# Altium PCB peripheral.PcbDoc
Units mm, origin at the board's own origin, x right, y up, seen from the top; angles counter-clockwise.
Board outline 100.36 x 100.41 mm, 2 copper layers (Top Layer, Bottom Layer); 16 components, 4 nets, 1248 pads, 0 vias.
Unrouted connection lines stored in the file: 60.
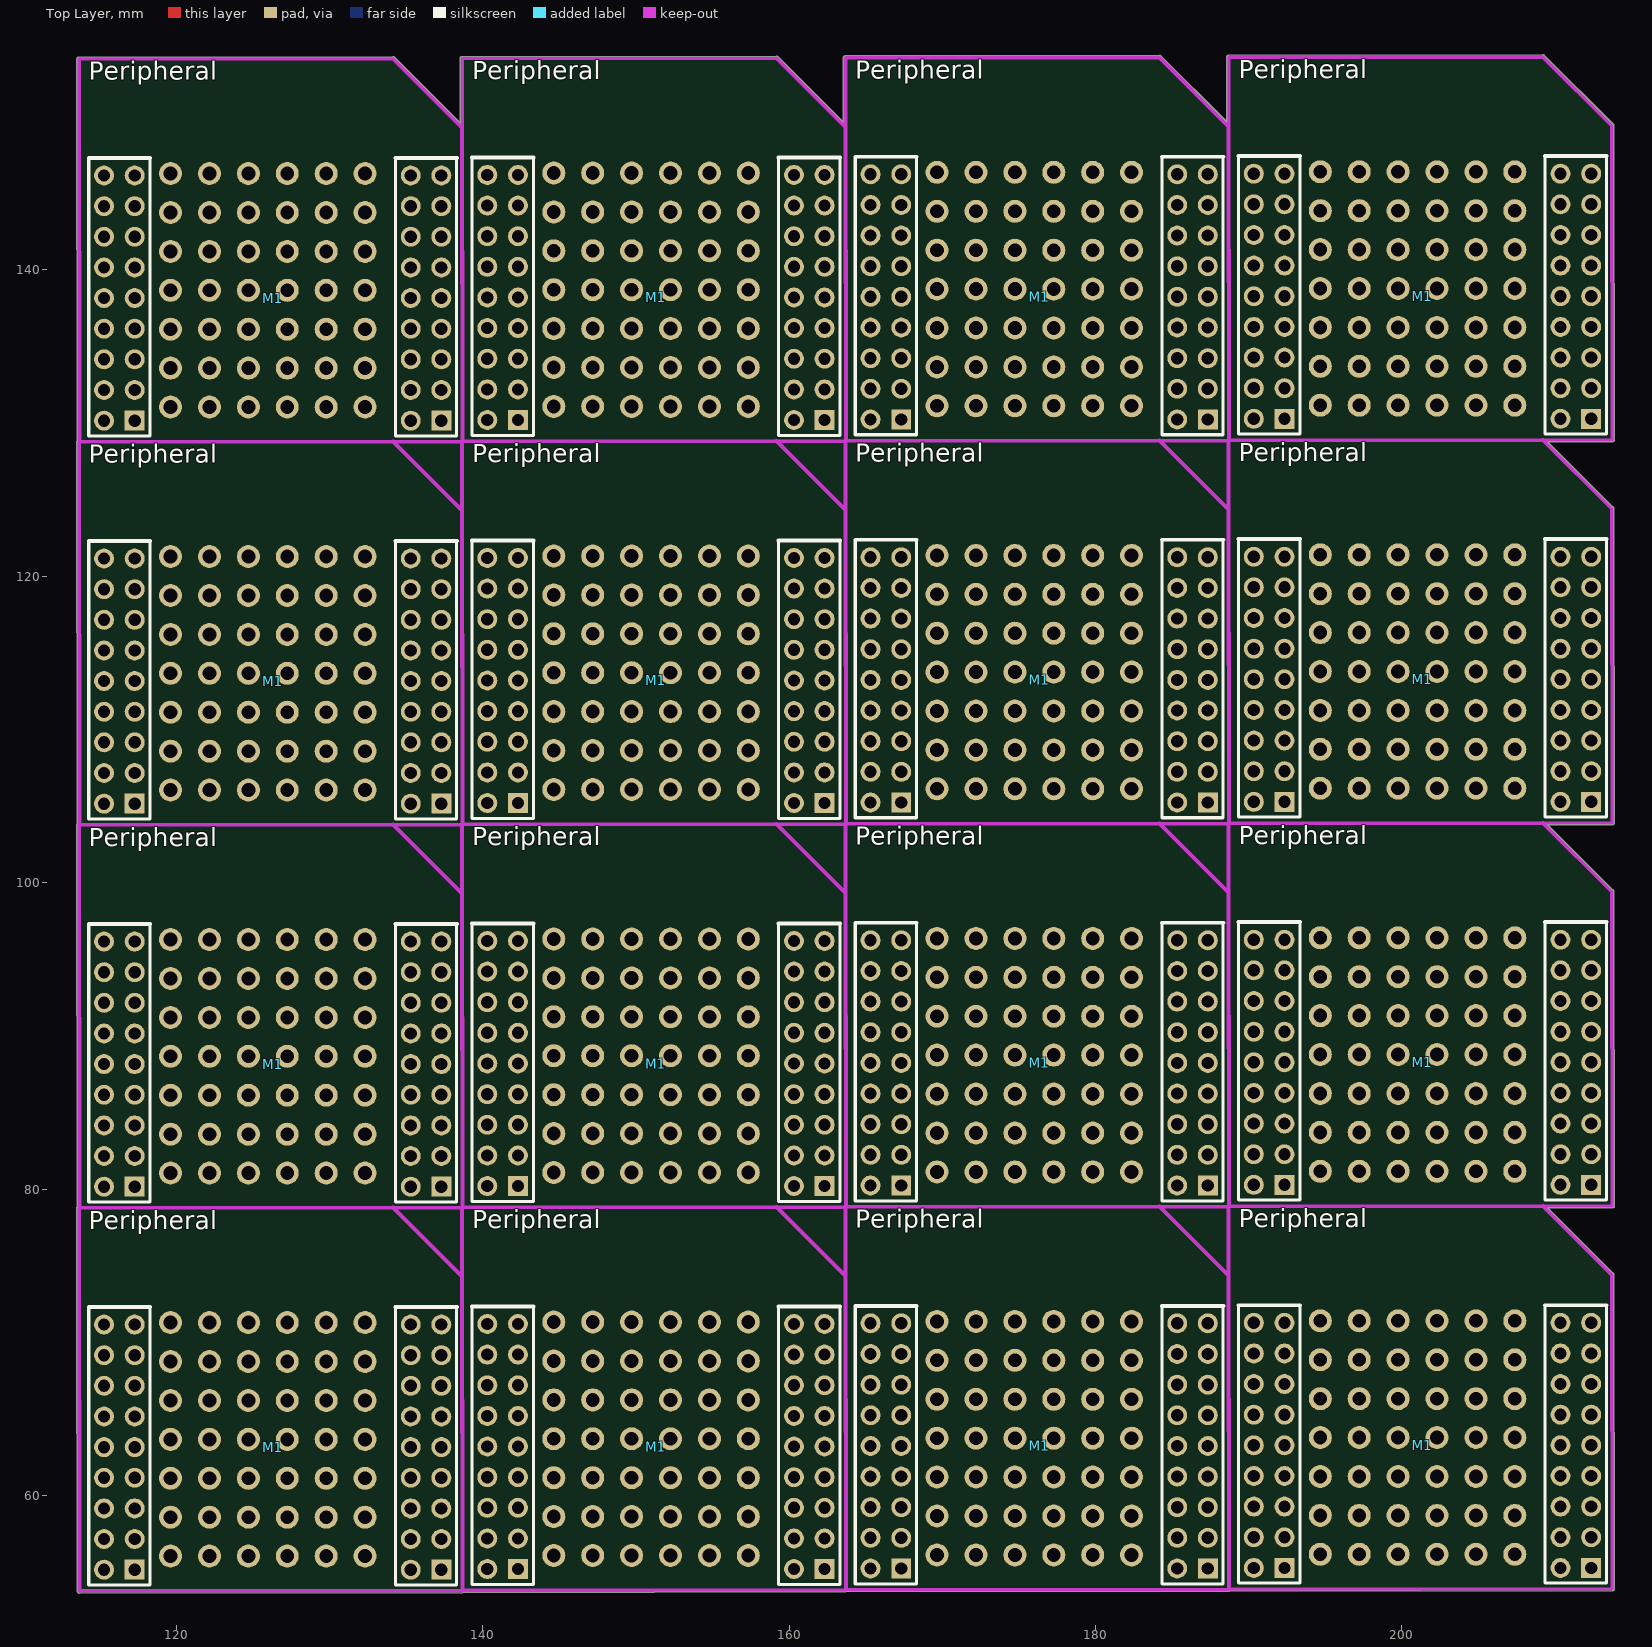
[diagram p0: Top Layer view]
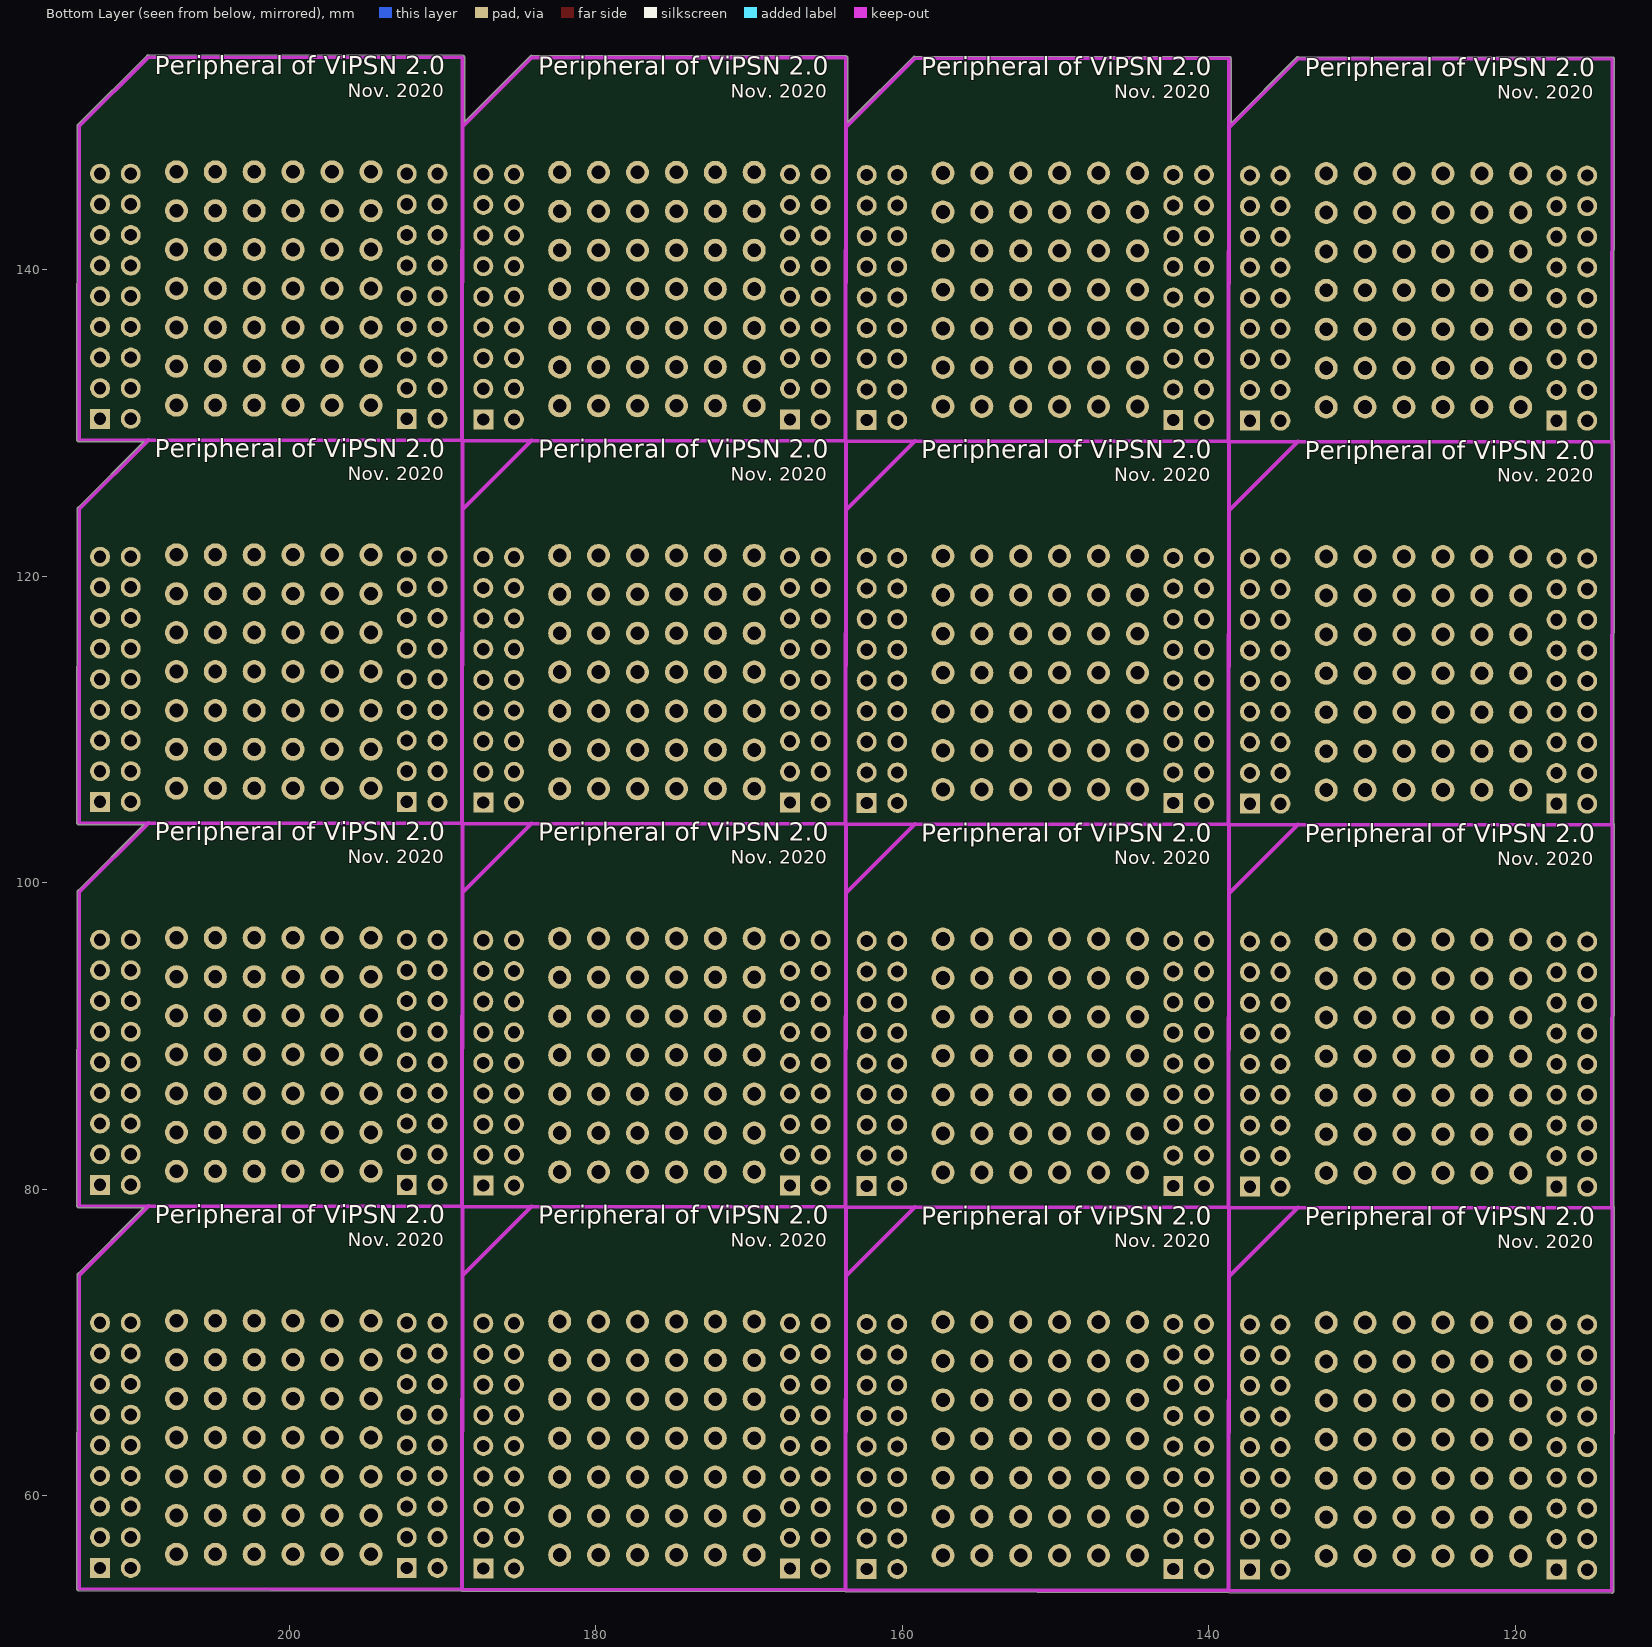
[diagram p1: Bottom Layer view, seen from below]

## Layer stack, top to bottom
Top Layer: signal copper 0.0356
Dielectric: dielectric 0.32, FR-4, Dk 4.8
Bottom Layer: signal copper 0.0356

## Board outline
113.517,78.754 cw(c113.645,78.754) 113.557,78.846 113.517,103.754 cw(c113.645,103.754) 113.557,103.846 113.517,128.754 cw(c113.645,128.754) 113.557,128.846 113.517,153.754 cw(c113.645,153.754) 113.645,153.881 134.16,153.914 cw(c134.16,153.786) 134.251,153.876 134.25,153.876 138.539,149.587 138.533,153.793 cw(c138.66,153.793) 138.66,153.921 159.175,153.953 cw(c159.176,153.826) 159.266,153.915 159.266,153.916 163.555,149.627 163.548,153.833 cw(c163.676,153.833) 163.675,153.96 184.191,153.992 cw(c184.191,153.865) 184.282,153.955 184.281,153.955 188.57,149.666 188.564,153.872 cw(c188.691,153.872) 188.691,154 209.206,154.032 cw(c209.206,153.904) 209.297,153.994 209.296,153.994 213.761,149.529 cw(c213.713,149.411) 213.841,149.412 213.873,128.912 cw(c213.746,128.912) 213.746,128.784 209.513,128.777 213.761,124.529 cw(c213.713,124.411) 213.841,124.412 213.873,103.912 cw(c213.746,103.912) 213.746,103.784 209.513,103.777 213.761,99.529 cw(c213.713,99.411) 213.841,99.412 213.873,78.912 cw(c213.746,78.912) 213.746,78.784 209.513,78.777 213.761,74.529 cw(c213.713,74.411) 213.841,74.412 213.873,53.912 213.873,53.911 cw(c213.746,53.911) 213.746,53.784 188.731,53.745 163.715,53.705 138.7,53.666 113.684,53.627 cw(c113.684,53.754) 113.557,53.754 113.525,74.256

## Design rules (kind name [scope] priority, off if disabled: settings)
Clearance [All] p1: gap=0.127
PolygonConnect [All] p1: connectstyle=Relief reliefconductorwidth=0.254 reliefentries=4 polygonreliefangle="90 Angle"
RoutingVias [All] p1: holewidth=0.711 width=1.27 viastyle="Through Hole" minholewidth=0.711 minwidth=1.27 maxholewidth=0.711 maxwidth=1.27
SilkscreenOverComponentPads SilkToSolderMaskClearance [IsPad] p1: minsilkscreentomaskgap=0.254
SolderMaskExpansion [All] p1: expansion=0.102
Width [All] p1: maxlimit=0.254 minlimit=0.254 preferedwidth=0.254
27 further rules are at their usual default settings.

## Components (designator, comment, footprint, x,y, rotation, side; value= is the part's Value field where it differs from the comment)
M1 "MHDR2X18" module9x4 212.33,146.277 r180 top
M1 "MHDR2X18" module9x4 212.33,121.277 r180 top
M1 "MHDR2X18" module9x4 212.33,96.277 r180 top
M1 "MHDR2X18" module9x4 212.33,71.277 r180 top
M1 "MHDR2X18" module9x4 187.314,146.238 r180 top
M1 "MHDR2X18" module9x4 187.314,121.238 r180 top
M1 "MHDR2X18" module9x4 187.314,96.238 r180 top
M1 "MHDR2X18" module9x4 187.314,71.238 r180 top
M1 "MHDR2X18" module9x4 162.299,146.199 r180 top
M1 "MHDR2X18" module9x4 162.299,121.199 r180 top
M1 "MHDR2X18" module9x4 162.299,96.199 r180 top
M1 "MHDR2X18" module9x4 162.299,71.199 r180 top
M1 "MHDR2X18" module9x4 137.283,146.159 r180 top
M1 "MHDR2X18" module9x4 137.283,121.159 r180 top
M1 "MHDR2X18" module9x4 137.283,96.159 r180 top
M1 "MHDR2X18" module9x4 137.283,71.159 r180 top

## Footprints (in the part's own frame and the unit in brackets; to place one, negate y for a bottom-side part, rotate by r counter-clockwise, add the part's x,y. Pads: shape width x height; smd on the part's side, far side on the other; paste and mask are expansions set on the pad)
module9x4 [mm]
  rect 1.3x1.3 hole 0.8: 1(-0.025,16.002) 36(19.99,16.002)
  round 1.3 hole 0.8: 2(21.99,16.002) 3(-0.025,14.002) 4(21.99,14.002) 5(-0.025,12.002) 6(21.99,12.002) 7(-0.025,10.002) 8(21.99,10.002) 9(-0.025,8.002) 10(21.99,8.002) 11(-0.025,6.002) 12(21.99,6.002) 13(-0.025,4.002) 14(21.99,4.002) 15(-0.025,2.002) 16(21.99,2.002) 17(-0.025,0.002) 18(21.99,0.002) 19(1.975,0.002) 20(19.99,0.002) 21(1.975,2.002) 22(19.99,2.002) 23(1.975,4.002) 24(19.99,4.002) 25(1.975,6.002) 26(19.99,6.002) 27(1.975,8.002) 28(19.99,8.002) 29(1.975,10.002) 30(19.99,10.002) 31(1.975,12.002) 32(19.99,12.002) 33(1.975,14.002) 34(19.99,14.002) 35(1.975,16.002)
  silkscreen extent -1.04,-1.14 22.99,17

## Part data
M1 M1 M1 M1 M1 M1 M1 M1 M1 M1 M1 M1 M1 M1 M1 M1: "Header, 18-Pin, Dual row"

## Free pads (board coordinates)
  round 1.5 hole 0.9: 1(119.63,56.044) 1(119.63,58.584) 1(119.63,61.124) 1(119.63,63.664) 1(119.63,66.202) 1(119.63,68.742) 1(119.63,71.284) 1(119.63,81.044) 1(119.63,83.584) 1(119.63,86.124) 1(119.63,88.664) 1(119.63,91.202) 1(119.63,93.742) 1(119.63,96.284) 1(119.63,106.044) 1(119.63,108.584) 1(119.63,111.124) 1(119.63,113.664) 1(119.63,116.202) 1(119.63,118.742) 1(119.63,121.284) 1(119.63,131.044) 1(119.63,133.584) 1(119.63,136.124) 1(119.63,138.664) 1(119.63,141.202) 1(119.63,143.742) 1(119.63,146.284) 1(122.172,56.044) 1(122.172,58.584) 1(122.172,61.124) 1(122.172,63.664) 1(122.172,66.202) 1(122.172,68.742) 1(122.172,71.284) 1(122.172,81.044) 1(122.172,83.584) 1(122.172,86.124) 1(122.172,88.664) 1(122.172,91.202) 1(122.172,93.742) 1(122.172,96.284) 1(122.172,106.044) 1(122.172,108.584) 1(122.172,111.124) 1(122.172,113.664) 1(122.172,116.202) 1(122.172,118.742) 1(122.172,121.284) 1(122.172,131.044) 1(122.172,133.584) 1(122.172,136.124) 1(122.172,138.664) 1(122.172,141.202) 1(122.172,143.742) 1(122.172,146.284) 1(124.712,56.044) 1(124.712,58.584) 1(124.712,61.124) 1(124.712,63.664) 1(124.712,66.202) 1(124.712,68.742) 1(124.712,71.284) 1(124.712,81.044) 1(124.712,83.584) 1(124.712,86.124) 1(124.712,88.664) 1(124.712,91.202) 1(124.712,93.742) 1(124.712,96.284) 1(124.712,106.044) 1(124.712,108.584) 1(124.712,111.124) 1(124.712,113.664) 1(124.712,116.202) 1(124.712,118.742) 1(124.712,121.284) 1(124.712,131.044) 1(124.712,133.584) 1(124.712,136.124) 1(124.712,138.664) 1(124.712,141.202) 1(124.712,143.742) 1(124.712,146.284) 1(127.25,56.044) 1(127.25,58.584) 1(127.25,61.124) 1(127.25,63.664) 1(127.25,66.202) 1(127.25,68.742) 1(127.25,71.284) 1(127.25,81.044) 1(127.25,83.584) 1(127.25,86.124) 1(127.25,88.664) 1(127.25,91.202) 1(127.25,93.742) 1(127.25,96.284) 1(127.25,106.044) 1(127.25,108.584) 1(127.25,111.124) 1(127.25,113.664) 1(127.25,116.202) 1(127.25,118.742) 1(127.25,121.284) 1(127.25,131.044) 1(127.25,133.584) 1(127.25,136.124) 1(127.25,138.664) 1(127.25,141.202) 1(127.25,143.742) 1(127.25,146.284) 1(129.79,56.044) 1(129.79,58.584) 1(129.79,61.124) 1(129.79,63.664) 1(129.79,66.202) 1(129.79,68.742) 1(129.79,71.284) 1(129.79,81.044) 1(129.79,83.584) 1(129.79,86.124) 1(129.79,88.664) 1(129.79,91.202) 1(129.79,93.742) 1(129.79,96.284) 1(129.79,106.044) 1(129.79,108.584) 1(129.79,111.124) 1(129.79,113.664) 1(129.79,116.202) 1(129.79,118.742) 1(129.79,121.284) 1(129.79,131.044) 1(129.79,133.584) 1(129.79,136.124) 1(129.79,138.664) 1(129.79,141.202) 1(129.79,143.742) 1(129.79,146.284) 1(132.33,56.044) 1(132.33,58.584) 1(132.33,61.124) 1(132.33,63.664) 1(132.33,66.202) 1(132.33,68.742) 1(132.33,71.284) 1(132.33,81.044) 1(132.33,83.584) 1(132.33,86.124) 1(132.33,88.664) 1(132.33,91.202) 1(132.33,93.742) 1(132.33,96.284) 1(132.33,106.044) 1(132.33,108.584) 1(132.33,111.124) 1(132.33,113.664) 1(132.33,116.202) 1(132.33,118.742) 1(132.33,121.284) 1(132.33,131.044) 1(132.33,133.584) 1(132.33,136.124) 1(132.33,138.664) 1(132.33,141.202) 1(132.33,143.742) 1(132.33,146.284) 1(144.646,56.084) 1(144.646,58.624) 1(144.646,61.164) 1(144.646,63.704) 1(144.646,66.242) 1(144.646,68.782) 1(144.646,71.324) 1(144.646,81.084) 1(144.646,83.624) 1(144.646,86.164) 1(144.646,88.704) 1(144.646,91.242) 1(144.646,93.782) 1(144.646,96.324) 1(144.646,106.084) 1(144.646,108.624) 1(144.646,111.164) 1(144.646,113.704) 1(144.646,116.242) 1(144.646,118.782) 1(144.646,121.324) 1(144.646,131.084) 1(144.646,133.624) 1(144.646,136.164) 1(144.646,138.704) 1(144.646,141.242) 1(144.646,143.782) 1(144.646,146.324) 1(147.188,56.084) 1(147.188,58.624) 1(147.188,61.164) 1(147.188,63.704) 1(147.188,66.242) 1(147.188,68.782) 1(147.188,71.324) 1(147.188,81.084) 1(147.188,83.624) 1(147.188,86.164) 1(147.188,88.704) 1(147.188,91.242) 1(147.188,93.782) 1(147.188,96.324) 1(147.188,106.084) 1(147.188,108.624) 1(147.188,111.164) 1(147.188,113.704) 1(147.188,116.242) 1(147.188,118.782) 1(147.188,121.324) 1(147.188,131.084) 1(147.188,133.624) 1(147.188,136.164) 1(147.188,138.704) 1(147.188,141.242) 1(147.188,143.782) 1(147.188,146.324) 1(149.728,56.084) 1(149.728,58.624) 1(149.728,61.164) 1(149.728,63.704) 1(149.728,66.242) 1(149.728,68.782) 1(149.728,71.324) 1(149.728,81.084) 1(149.728,83.624) 1(149.728,86.164) 1(149.728,88.704) 1(149.728,91.242) 1(149.728,93.782) 1(149.728,96.324) 1(149.728,106.084) 1(149.728,108.624) 1(149.728,111.164) 1(149.728,113.704) 1(149.728,116.242) 1(149.728,118.782) 1(149.728,121.324) 1(149.728,131.084) 1(149.728,133.624) 1(149.728,136.164) 1(149.728,138.704) 1(149.728,141.242) 1(149.728,143.782) 1(149.728,146.324) 1(152.266,56.084) 1(152.266,58.624) 1(152.266,61.164) 1(152.266,63.704) 1(152.266,66.242) 1(152.266,68.782) 1(152.266,71.324) 1(152.266,81.084) 1(152.266,83.624) 1(152.266,86.164) 1(152.266,88.704) 1(152.266,91.242) 1(152.266,93.782) 1(152.266,96.324) 1(152.266,106.084) 1(152.266,108.624) 1(152.266,111.164) 1(152.266,113.704) 1(152.266,116.242) 1(152.266,118.782) 1(152.266,121.324) 1(152.266,131.084) 1(152.266,133.624) 1(152.266,136.164) 1(152.266,138.704) 1(152.266,141.242) 1(152.266,143.782) 1(152.266,146.324) 1(154.806,56.084) 1(154.806,58.624) 1(154.806,61.164) 1(154.806,63.704) 1(154.806,66.242) 1(154.806,68.782) 1(154.806,71.324) 1(154.806,81.084) 1(154.806,83.624) 1(154.806,86.164) 1(154.806,88.704) 1(154.806,91.242) 1(154.806,93.782) 1(154.806,96.324) 1(154.806,106.084) 1(154.806,108.624) 1(154.806,111.164) 1(154.806,113.704) 1(154.806,116.242) 1(154.806,118.782) 1(154.806,121.324) 1(154.806,131.084) 1(154.806,133.624) 1(154.806,136.164) 1(154.806,138.704) 1(154.806,141.242) 1(154.806,143.782) 1(154.806,146.324) 1(157.346,56.084) 1(157.346,58.624) 1(157.346,61.164) 1(157.346,63.704) 1(157.346,66.242) 1(157.346,68.782) 1(157.346,71.324) 1(157.346,81.084) 1(157.346,83.624) 1(157.346,86.164) 1(157.346,88.704) 1(157.346,91.242) 1(157.346,93.782) 1(157.346,96.324) 1(157.346,106.084) 1(157.346,108.624) 1(157.346,111.164) 1(157.346,113.704) 1(157.346,116.242) 1(157.346,118.782) 1(157.346,121.324) 1(157.346,131.084) 1(157.346,133.624) 1(157.346,136.164) 1(157.346,138.704) 1(157.346,141.242) 1(157.346,143.782) 1(157.346,146.324) 1(169.661,56.123) 1(169.661,58.663) 1(169.661,61.203) 1(169.661,63.743) 1(169.661,66.281) 1(169.661,68.821) 1(169.661,71.363) 1(169.661,81.123) 1(169.661,83.663) 1(169.661,86.203) 1(169.661,88.743) 1(169.661,91.281) 1(169.661,93.821) 1(169.661,96.363) 1(169.661,106.123) 1(169.661,108.663) 1(169.661,111.203) 1(169.661,113.743) 1(169.661,116.281) 1(169.661,118.821) 1(169.661,121.363) 1(169.661,131.123) 1(169.661,133.663) 1(169.661,136.203) 1(169.661,138.743) 1(169.661,141.281) 1(169.661,143.821) 1(169.661,146.363) 1(172.203,56.123) 1(172.203,58.663) 1(172.203,61.203) 1(172.203,63.743) 1(172.203,66.281) 1(172.203,68.821) 1(172.203,71.363) 1(172.203,81.123) 1(172.203,83.663) 1(172.203,86.203) 1(172.203,88.743) 1(172.203,91.281) 1(172.203,93.821) 1(172.203,96.363) 1(172.203,106.123) 1(172.203,108.663) 1(172.203,111.203) 1(172.203,113.743) 1(172.203,116.281) 1(172.203,118.821) 1(172.203,121.363) 1(172.203,131.123) 1(172.203,133.663) 1(172.203,136.203) 1(172.203,138.743) 1(172.203,141.281) 1(172.203,143.821) 1(172.203,146.363) 1(174.743,56.123) 1(174.743,58.663) 1(174.743,61.203) 1(174.743,63.743) 1(174.743,66.281) 1(174.743,68.821) 1(174.743,71.363) 1(174.743,81.123) 1(174.743,83.663) 1(174.743,86.203) 1(174.743,88.743) 1(174.743,91.281) 1(174.743,93.821) 1(174.743,96.363) 1(174.743,106.123) 1(174.743,108.663) 1(174.743,111.203) 1(174.743,113.743) 1(174.743,116.281) 1(174.743,118.821) 1(174.743,121.363) 1(174.743,131.123) 1(174.743,133.663) 1(174.743,136.203) 1(174.743,138.743) 1(174.743,141.281) 1(174.743,143.821) 1(174.743,146.363) 1(177.281,56.123) 1(177.281,58.663) 1(177.281,61.203) 1(177.281,63.743) 1(177.281,66.281) 1(177.281,68.821) 1(177.281,71.363) 1(177.281,81.123) 1(177.281,83.663) 1(177.281,86.203) 1(177.281,88.743) 1(177.281,91.281) 1(177.281,93.821) 1(177.281,96.363) 1(177.281,106.123) 1(177.281,108.663) 1(177.281,111.203) 1(177.281,113.743) 1(177.281,116.281) 1(177.281,118.821) 1(177.281,121.363) 1(177.281,131.123) 1(177.281,133.663) 1(177.281,136.203) 1(177.281,138.743) 1(177.281,141.281) 1(177.281,143.821) 1(177.281,146.363) 1(179.821,56.123) 1(179.821,58.663) 1(179.821,61.203) 1(179.821,63.743) 1(179.821,66.281) 1(179.821,68.821) 1(179.821,71.363) 1(179.821,81.123) 1(179.821,83.663) 1(179.821,86.203) 1(179.821,88.743) 1(179.821,91.281) 1(179.821,93.821) 1(179.821,96.363) 1(179.821,106.123) 1(179.821,108.663) 1(179.821,111.203) 1(179.821,113.743) 1(179.821,116.281) 1(179.821,118.821) 1(179.821,121.363) 1(179.821,131.123) 1(179.821,133.663) 1(179.821,136.203) 1(179.821,138.743) 1(179.821,141.281) 1(179.821,143.821) 1(179.821,146.363) 1(182.361,56.123) 1(182.361,58.663) 1(182.361,61.203) 1(182.361,63.743) 1(182.361,66.281) 1(182.361,68.821) 1(182.361,71.363) 1(182.361,81.123) 1(182.361,83.663) 1(182.361,86.203) 1(182.361,88.743) 1(182.361,91.281) 1(182.361,93.821) 1(182.361,96.363) 1(182.361,106.123) 1(182.361,108.663) 1(182.361,111.203) 1(182.361,113.743) 1(182.361,116.281) 1(182.361,118.821) 1(182.361,121.363) 1(182.361,131.123) 1(182.361,133.663) 1(182.361,136.203) 1(182.361,138.743) 1(182.361,141.281) 1(182.361,143.821) 1(182.361,146.363) 1(194.677,56.162) 1(194.677,58.702) 1(194.677,61.242) 1(194.677,63.782) 1(194.677,66.32) 1(194.677,68.86) 1(194.677,71.402) 1(194.677,81.162) 1(194.677,83.702) 1(194.677,86.242) 1(194.677,88.782) 1(194.677,91.32) 1(194.677,93.86) 1(194.677,96.402) 1(194.677,106.162) 1(194.677,108.702) 1(194.677,111.242) 1(194.677,113.782) 1(194.677,116.32) 1(194.677,118.86) 1(194.677,121.402) 1(194.677,131.162) 1(194.677,133.702) 1(194.677,136.242) 1(194.677,138.782) 1(194.677,141.32) 1(194.677,143.86) 1(194.677,146.402) 1(197.219,56.162) 1(197.219,58.702) 1(197.219,61.242) 1(197.219,63.782) 1(197.219,66.32) 1(197.219,68.86) 1(197.219,71.402) 1(197.219,81.162) 1(197.219,83.702) 1(197.219,86.242) 1(197.219,88.782) 1(197.219,91.32) 1(197.219,93.86) 1(197.219,96.402) 1(197.219,106.162) 1(197.219,108.702) 1(197.219,111.242) 1(197.219,113.782) 1(197.219,116.32) 1(197.219,118.86) 1(197.219,121.402) 1(197.219,131.162) 1(197.219,133.702) 1(197.219,136.242) 1(197.219,138.782) 1(197.219,141.32) 1(197.219,143.86) 1(197.219,146.402) 1(199.759,56.162) 1(199.759,58.702) 1(199.759,61.242) 1(199.759,63.782) 1(199.759,66.32) 1(199.759,68.86) 1(199.759,71.402) 1(199.759,81.162) 1(199.759,83.702) 1(199.759,86.242) 1(199.759,88.782) 1(199.759,91.32) 1(199.759,93.86) 1(199.759,96.402) 1(199.759,106.162) 1(199.759,108.702) 1(199.759,111.242) 1(199.759,113.782) 1(199.759,116.32) 1(199.759,118.86) 1(199.759,121.402) 1(199.759,131.162) 1(199.759,133.702) 1(199.759,136.242) 1(199.759,138.782) 1(199.759,141.32) 1(199.759,143.86) 1(199.759,146.402) 1(202.297,56.162) 1(202.297,58.702) 1(202.297,61.242) 1(202.297,63.782) 1(202.297,66.32) 1(202.297,68.86) 1(202.297,71.402) 1(202.297,81.162) 1(202.297,83.702) 1(202.297,86.242) 1(202.297,88.782) 1(202.297,91.32) 1(202.297,93.86) 1(202.297,96.402) 1(202.297,106.162) 1(202.297,108.702) 1(202.297,111.242) 1(202.297,113.782) 1(202.297,116.32) 1(202.297,118.86) 1(202.297,121.402) 1(202.297,131.162) 1(202.297,133.702) 1(202.297,136.242) 1(202.297,138.782) 1(202.297,141.32) 1(202.297,143.86) 1(202.297,146.402) 1(204.837,56.162) 1(204.837,58.702) 1(204.837,61.242) 1(204.837,63.782) 1(204.837,66.32) 1(204.837,68.86) 1(204.837,71.402) 1(204.837,81.162) 1(204.837,83.702) 1(204.837,86.242) 1(204.837,88.782) 1(204.837,91.32) 1(204.837,93.86) 1(204.837,96.402) 1(204.837,106.162) 1(204.837,108.702) 1(204.837,111.242) 1(204.837,113.782) 1(204.837,116.32) 1(204.837,118.86) 1(204.837,121.402) 1(204.837,131.162) 1(204.837,133.702) 1(204.837,136.242) 1(204.837,138.782) 1(204.837,141.32) 1(204.837,143.86) 1(204.837,146.402) 1(207.377,56.162) 1(207.377,58.702) 1(207.377,61.242) 1(207.377,63.782) 1(207.377,66.32) 1(207.377,68.86) 1(207.377,71.402) 1(207.377,81.162) 1(207.377,83.702) 1(207.377,86.242) 1(207.377,88.782) 1(207.377,91.32) 1(207.377,93.86) 1(207.377,96.402) 1(207.377,106.162) 1(207.377,108.702) 1(207.377,111.242) 1(207.377,113.782) 1(207.377,116.32) 1(207.377,118.86) 1(207.377,121.402) 1(207.377,131.162) 1(207.377,133.702) 1(207.377,136.242) 1(207.377,138.782) 1(207.377,141.32) 1(207.377,143.86) 1(207.377,146.402)

## Nets (pads, with @x,y where several pads share a name; then routed paths per layer and width w, separated by ;. In a path a pad name is that pad's centre, name@x,y a point inside that pad or via, vN(x,y) a via of type N, cw(c..) or ccw(c..) an arc to the next point about the centre after c; other vN are vias at no path point)
GND: M1.36
PZ1: M1.3
PZ2: M1.1
VSTO: M1.2
pads on no net: M1.4 M1.5 M1.6 M1.7 M1.8 M1.9 M1.10 M1.11 M1.12 M1.13 M1.14 M1.15 M1.16 M1.17 M1.18 M1.19 M1.20 M1.21 M1.22 M1.23 M1.24 M1.25 M1.26 M1.27 M1.28 M1.29 M1.30 M1.31 M1.32 M1.33 M1.34 M1.35

## Keep-outs
Keep-Out Layer:
  lines w0.254: 113.652,74.254 113.684,53.754 ; 138.66,74.286 134.16,78.786 113.645,78.754 113.684,53.754 ; 138.66,99.286 134.16,103.786 113.645,103.754 113.684,78.754 138.7,78.793 ; 138.66,124.286 134.16,128.786 113.645,128.754 113.684,103.754 138.7,103.793 ; 138.66,149.286 134.16,153.786 113.645,153.754 113.684,128.754 138.7,128.793 ; 138.667,74.293 138.7,53.793 ; 138.667,99.293 138.7,78.793 ; 138.667,124.293 138.7,103.793 ; 138.667,149.293 138.7,128.793 ; 163.676,74.326 159.176,78.826 138.66,78.793 138.7,53.793 ; 163.676,99.326 159.176,103.826 138.66,103.793 138.7,78.793 ; 163.676,124.326 159.176,128.826 138.66,128.793 138.7,103.793 ; 163.676,149.326 159.176,153.826 138.66,153.793 138.7,128.793 ; 163.683,74.333 163.715,53.833 ; 163.683,99.333 163.715,78.833 ; 163.683,124.333 163.715,103.833 ; 163.683,149.333 163.715,128.833 ; 188.691,74.365 184.191,78.865 163.676,78.833 163.715,53.833 ; 188.691,99.365 184.191,103.865 163.676,103.833 163.715,78.833 ; 188.691,124.365 184.191,128.865 163.676,128.833 163.715,103.833 ; 188.691,149.365 184.191,153.865 163.676,153.833 163.715,128.833 ; 188.698,74.372 188.73,53.872 ; 188.698,99.372 188.73,78.872 ; 188.698,124.372 188.73,103.872 ; 188.698,149.372 188.73,128.872 ; 213.706,74.404 209.206,78.904 188.691,78.872 188.73,53.872 ; 213.706,99.404 209.206,103.904 188.691,103.872 188.73,78.872 ; 213.706,124.404 209.206,128.904 188.691,128.872 188.73,103.872 ; 213.706,149.404 209.206,153.904 188.691,153.872 188.73,128.872 ; 213.713,74.411 213.746,53.911 188.73,53.872 ; 213.713,99.411 213.746,78.912 188.73,78.872 ; 213.713,124.411 213.746,103.912 188.73,103.872 ; 213.713,149.411 213.746,128.912 188.73,128.872 ; 113.684,53.754 138.7,53.793 ; 138.7,53.793 163.715,53.833 ; 138.7,78.793 163.715,78.833 ; 138.7,103.793 163.715,103.833 ; 138.7,128.793 163.715,128.833 ; 163.715,53.833 188.73,53.872 ; 163.715,78.833 188.73,78.872 ; 163.715,103.833 188.73,103.872 ; 163.715,128.833 188.73,128.872

## Silkscreen, mask and mechanical layers (free items; w line width, h text height)
Top Overlay:
  text "Peripheral" at 189.343,152.119 h2.03
  text "Peripheral" at 164.327,152.08 h2.03
  text "Peripheral" at 139.312,152.041 h2.03
  text "Peripheral" at 114.296,152.001 h2.03
  text "Peripheral" at 189.343,127.119 h2.03
  text "Peripheral" at 164.327,127.08 h2.03
  text "Peripheral" at 139.312,127.041 h2.03
  text "Peripheral" at 114.296,127.001 h2.03
  text "Peripheral" at 189.343,102.119 h2.03
  text "Peripheral" at 164.327,102.08 h2.03
  text "Peripheral" at 139.312,102.041 h2.03
  text "Peripheral" at 114.296,102.001 h2.03
  text "Peripheral" at 189.343,77.119 h2.03
  text "Peripheral" at 164.327,77.08 h2.03
  text "Peripheral" at 139.312,77.041 h2.03
  text "Peripheral" at 114.296,77.001 h2.03
Bottom Overlay:
  text "Peripheral of ViPSN 2.0" at 208.774,152.373 h2.03
  text "Peripheral of ViPSN 2.0" at 183.758,152.334 h2.03
  text "Peripheral of ViPSN 2.0" at 158.743,152.295 h2.03
  text "Peripheral of ViPSN 2.0" at 133.727,152.255 h2.03
  text "Nov. 2020" at 196.201,150.976 h1.52
  text "Nov. 2020" at 171.185,150.937 h1.52
  text "Nov. 2020" at 146.17,150.898 h1.52
  text "Nov. 2020" at 121.154,150.858 h1.52
  text "Peripheral of ViPSN 2.0" at 208.774,127.373 h2.03
  text "Peripheral of ViPSN 2.0" at 183.758,127.334 h2.03
  text "Peripheral of ViPSN 2.0" at 158.743,127.295 h2.03
  text "Peripheral of ViPSN 2.0" at 133.727,127.255 h2.03
  text "Nov. 2020" at 196.201,125.976 h1.52
  text "Nov. 2020" at 171.185,125.937 h1.52
  text "Nov. 2020" at 146.17,125.898 h1.52
  text "Nov. 2020" at 121.154,125.858 h1.52
  text "Peripheral of ViPSN 2.0" at 208.774,102.373 h2.03
  text "Peripheral of ViPSN 2.0" at 183.758,102.334 h2.03
  text "Peripheral of ViPSN 2.0" at 158.743,102.295 h2.03
  text "Peripheral of ViPSN 2.0" at 133.727,102.255 h2.03
  text "Nov. 2020" at 196.201,100.976 h1.52
  text "Nov. 2020" at 171.185,100.937 h1.52
  text "Nov. 2020" at 146.17,100.898 h1.52
  text "Nov. 2020" at 121.154,100.858 h1.52
  text "Peripheral of ViPSN 2.0" at 208.774,77.373 h2.03
  text "Peripheral of ViPSN 2.0" at 183.758,77.334 h2.03
  text "Peripheral of ViPSN 2.0" at 158.743,77.295 h2.03
  text "Peripheral of ViPSN 2.0" at 133.727,77.255 h2.03
  text "Nov. 2020" at 196.201,75.976 h1.52
  text "Nov. 2020" at 171.185,75.937 h1.52
  text "Nov. 2020" at 146.17,75.898 h1.52
  text "Nov. 2020" at 121.154,75.858 h1.52